# Altium PCB РАЗВОДКА.PcbDoc
Units mm, origin at the board's own origin, x right, y up, seen from the top; angles counter-clockwise.
Board outline 36.78 x 15.7 mm, 2 copper layers (Top Layer, Bottom Layer); 13 components, 7 nets, 31 pads, 2 vias.
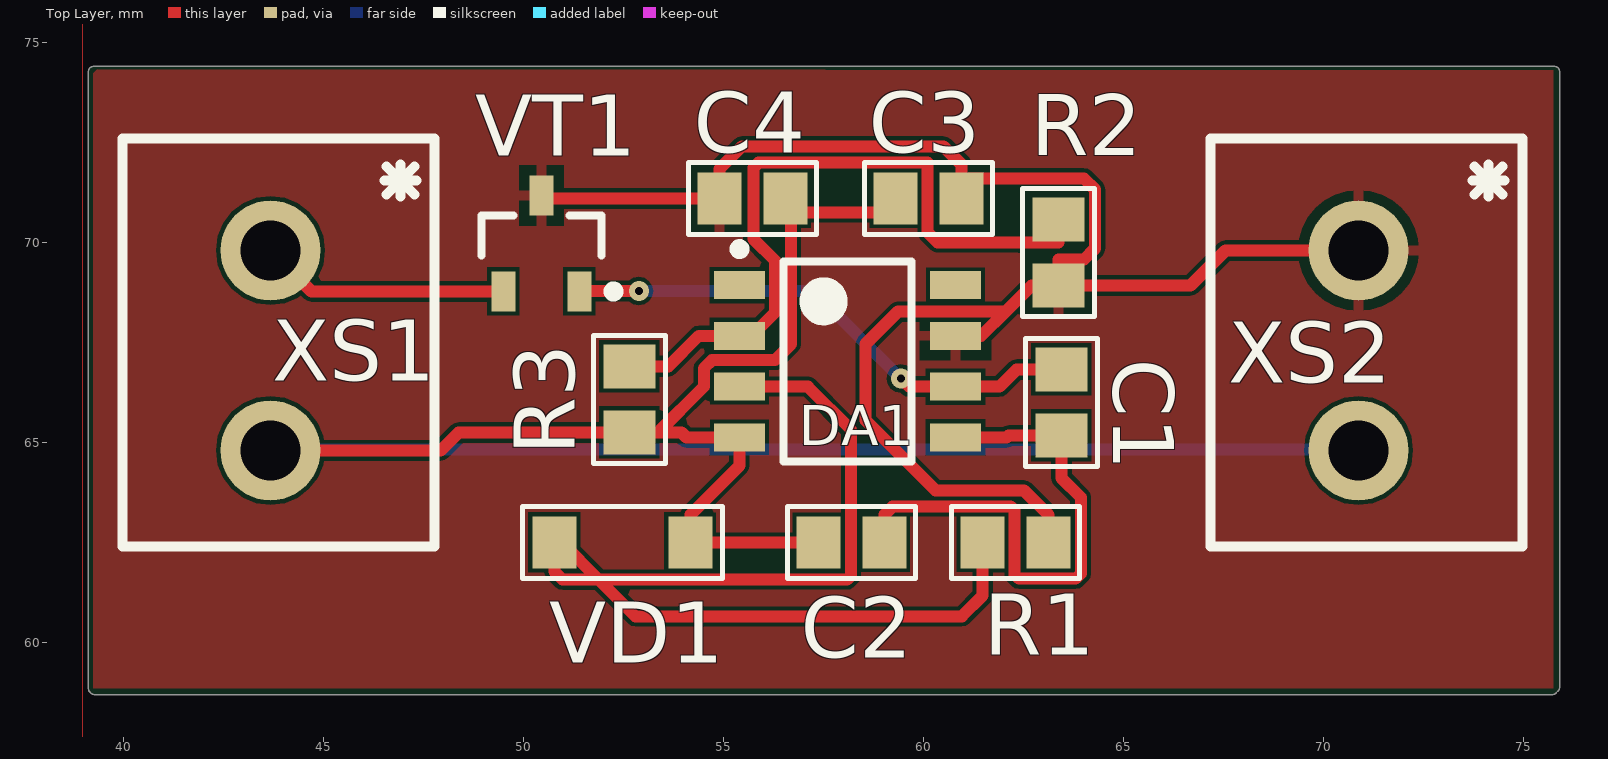
[diagram p0: Top Layer view]
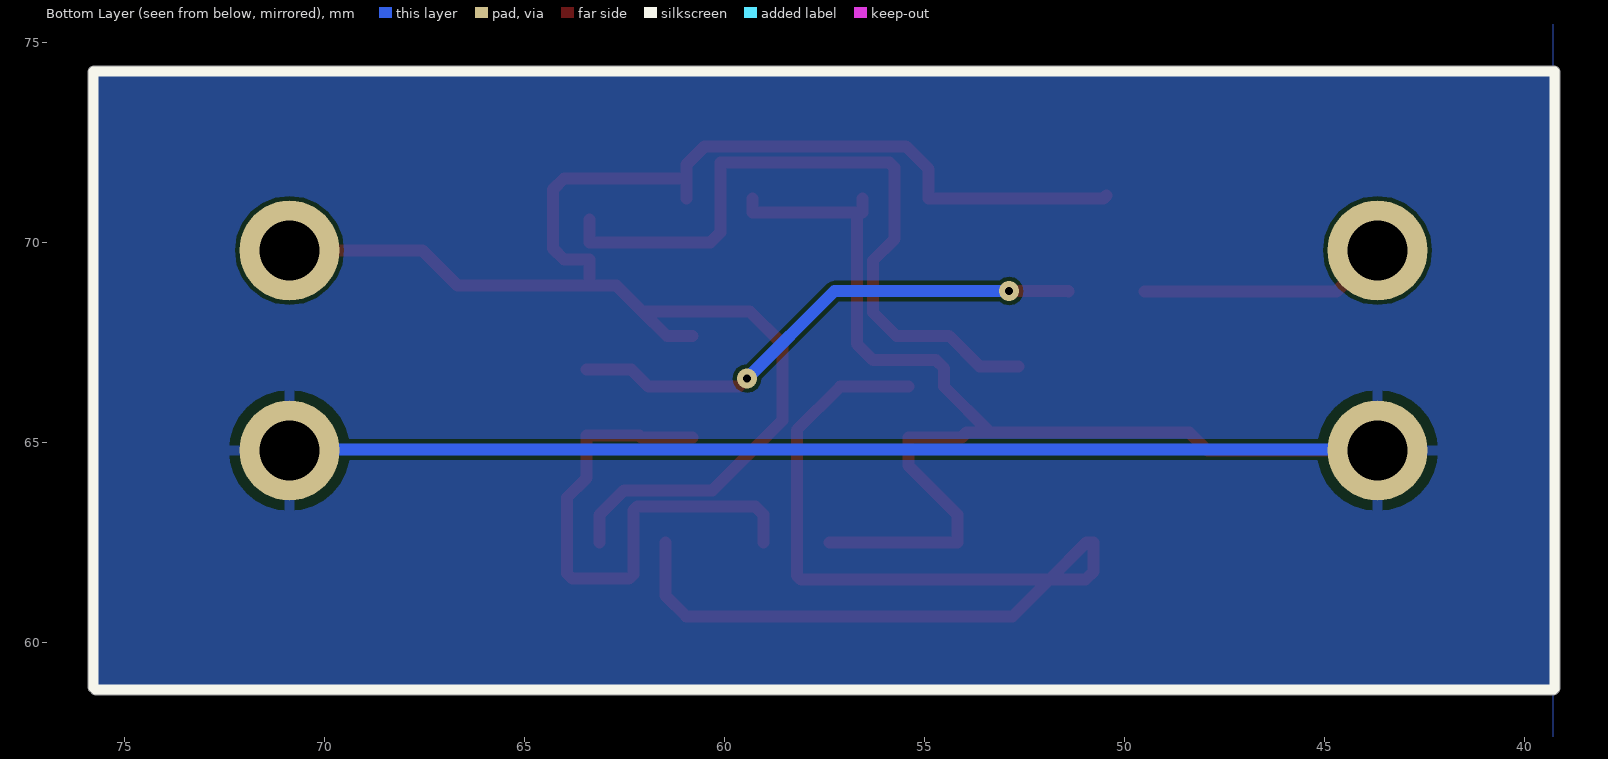
[diagram p1: Bottom Layer view, seen from below]
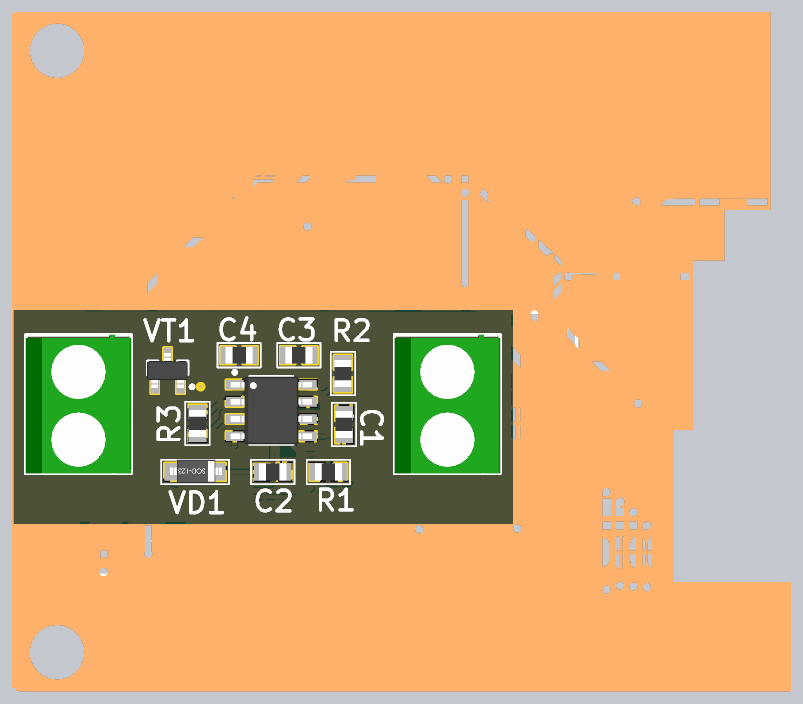
[diagram p2: 3D render of the assembled board from above, using the file's embedded part models]

## Layer stack, top to bottom
Top Solder: solder mask 0.0102, Solder Resist, Dk 3.5
Top Layer: signal copper 0.0356
Dielectric 1: dielectric 0.32, FR-4, Dk 4.8
Bottom Layer: signal copper 0.0356
Bottom Solder: solder mask 0.0102, Solder Resist, Dk 3.5

## Board outline
39.16,58.759 cw(c39.25,58.85) 39.123,58.85 39.123,74.275 cw(c39.25,74.275) 39.25,74.402 75.775,74.402 cw(c75.775,74.275) 75.902,74.275 75.902,58.875 cw(c75.775,58.875) 75.865,58.785 75.815,58.735 cw(c75.725,58.825) 75.725,58.698 39.275,58.698 cw(c39.275,58.825) 39.184,58.735 39.185,58.735

## Design rules (kind name [scope] priority, off if disabled: settings)
Clearance [All] p1: gap=0.1 ignorepadtopadclearanceinfootprint=FALSE except(0: Arc-Hole Track-Hole SMDPad-Hole THPad-Hole Via-Hole Fill-Hole Poly-Hole Region-Hole Text-Hole)
MinimumAnnularRing MinimumAnnularRing_1 [All] p1: minimumring=0.254
MinimumAnnularRing [All] p2: minimumring=0.254
PolygonConnect [All] p1: connectstyle=Relief reliefconductorwidth=0.254 reliefentries=4 polygonreliefangle="90 Angle" airgapwidth=0.254
RoutingVias [All] p1: holewidth=0.1 width=1.27 viastyle="Through Hole" minholewidth=0.2 minwidth=0.4 maxholewidth=0.2 maxwidth=0.4
SolderMaskExpansion [All] p1: expansion=0.102 istentingtop=FALSE
Width [All] p1: maxlimit=1 minlimit=0.1 preferedwidth=0.3
30 further rules are at their usual default settings.

## Classes and differential pairs
component class "Схема принципиальная": C1 C2 C3 C4 DA1 R1 R2 R3 VD1 VT1 XS1 XS2

## Components (designator, comment, footprint, x,y, rotation, side; value= is the part's Value field where it differs from the comment)
C1 "0.047u" 0805 63.45,66 r90 top
C2 "1000" 0805 58.2,62.5 r0 top
C3 "0.015u" 0805 60.125,71.1 r180 top
C4 "0.068u" 0805 55.725,71.1 r180 top
DA1 "КФ140УД18" SOIC-8 58.1,67.03 r0 top
R1 "300" 0805 62.3,62.5 r0 top
R2 "7,5k" 0805 63.375,69.75 r270 top
R3 "18k" 0805 52.65,66.075 r90 top
VD1 "MMSZ5235B" SOD-123 52.475,62.5 r180 top (schematic designator VD?)
VT1 "IRLML2402TRPBF" SOT23 50.45,69.975 r90 top
XS1 "XS 2 pin 220 B" DG126-5.0-02P 43.675,64.8 r0 top
XS2 "XS 2 pin 9v" DG126-5.0-02P 70.875,64.8 r0 top
ZBOAS351793286 "Comment" "BOASVIEWassembly:Вид спереди для сборочного:4:1:0:101" 89.35,2369.475 r0 top

## Footprints (in the part's own frame and the unit in brackets; to place one, negate y for a bottom-side part, rotate by r counter-clockwise, add the part's x,y. Pads: shape width x height; smd on the part's side, far side on the other; paste and mask are expansions set on the pad)
0805 [mm] "Чип (SMD)"
  rect 1.1x1.3 smd: 1(-0.825,0) 2(0.825,0)
  silkscreen extent -1.6,-0.9 1.6,0.9, body extent -1,-0.63 1,0.63, height 0.5
"BOASVIEWassembly:Вид спереди для сборочного:4:1:0:101" [mm]
DG126-5.0-02P [mm]
  round 2.5 hole 1.5: 1(0,5) 2(0,0)
  silkscreen extent -3.7,-2.4 4.1,7.8, body extent -3.7,-2.42 4.1,7.82, height 9.95
SOD-123 [mm] "(SMD)"
  rect 1.1x1.3 smd: 1(-1.7,0) 2(1.7,0)
  silkscreen extent -2.5,-0.9 2.5,0.9, body extent -2,-0.9 1.85,0.8, height 1.37
SOIC-8 [mm] "SOIC, 8-Leads, Body 4,90x3,90mm, Pitch 1,27mm, IPC Medium Density"
  rect 1.28x0.7 smd: 1(-2.7,1.905) 2(-2.7,0.635) 3(-2.7,-0.635) 4(-2.7,-1.905) 5(2.7,-1.905) 6(2.7,-0.635) 7(2.7,0.635) 8(2.7,1.905)
  silkscreen extent -2.82,-2.5 1.6,2.93, body extent -3,-2.5 3,2.5, height 1.75
SOT23 [mm] "SOT23, 3-Leads, Body 2,92x2,45mm, Pitch 0,95mm, IPC Medium Density"
  rect 1x0.6 smd: 1(-1.2,-0.95) 2(-1.2,0.95) 3(1.2,0)
  silkscreen extent -1.32,-1.92 0.7,1.5, body extent -1.3,-1.52 1.3,1.52, height 1.12

## Part data
C1: library part "К53-68\"R\"-25В-0.047 мкФ ±10% 0805_3", "К53-68\"R\"-25В-0.047 мкФ ±10%"
C2: library part "К53-68\"R\"-25В-1000 пФ ±10% 0805_2", "К53-68\"R\"-25В-1000 пФ ±10%"
C3: library part "К53-68\"R\"-25В-0.015 мкФ ±10% 0805_1", "К53-68\"R\"-25В-0.015 мкФ ±10%"
C4: library part "К53-68\"R\"-25В-0.068 мкФ ±10% 0805", "К53-68\"R\"-25В-0.068 мкФ ±10%"
DA1: "Операционный усилитель среднего класса точности с дифференциальным входом"
R1: library part "0.125Вт 0805 300 Ом, 5%, Чип резистор (SMD)", "0805-0.125 Вт -300 Ом±5%"
R2: library part "0.125Вт 0805 7,5 кОм, 5%, Чип резистор (SMD)", "0805-0.125 Вт -7,5 кОм±5%"
R3: library part "0.125Вт 0805 18 кОм, 5%, Чип резистор (SMD)", "0805-0.125 Вт -18 кОм±5%"
VD1: "Стабилитрон 6.8В 0.5Вт [SOD-123]"
VT1: "SI2304DDS-T1-GE3"

## Via types
v1: diameter 0.5, hole 0.2, Top Layer to Bottom Layer, 2 vias

## Nets (pads, with @x,y where several pads share a name; then routed paths per layer and width w, separated by ;. In a path a pad name is that pad's centre, name@x,y a point inside that pad or via, vN(x,y) a via of type N, cw(c..) or ccw(c..) an arc to the next point about the centre after c; other vN are vias at no path point)
GND: C2.1 C3.2 C4.1 DA1.4 R3.1 VD1.1 XS1.2 XS2.2 | length 56.8
  Top Layer w0.3: XS1.2 47.93,64.8 48.38,65.25 R3.1 53.363,65.25 ; C4.1 56.55,70.75 C4.1@56.693,70.75 ; C2.1 VD1.1 54.175,63.195 55.4,64.42 DA1.4 54.075,65.125 53.95,65.25 53.363,65.25 ; C3.2 59.3,70.75 C4.1@56.693,70.75 ; 53.363,65.25 54.508,66.396 54.508,66.853 54.712,67.056 56.286,67.056 56.693,67.462 C4.1@56.693,70.75
  Bottom Layer w0.3: XS1.2 43.696,64.821 70.854,64.821 XS2.2
NetC1_1: C1.1 C2.2 DA1.5 | length 13.7
  Top Layer w0.3: C2.2 59.025,63.195 59.23,63.4 62.179,63.4 62.281,63.298 62.281,61.697 62.382,61.595 63.805,61.595 63.932,61.722 63.932,63.627 63.45,64.109 C1.1 62.128,65.175 62.078,65.125 DA1.5
NetC1_2: C1.2 DA1.6 VT1.1 | length 13.2
  Top Layer w0.3: VT1.1 51.4,68.783 v1(52.883,68.783) ; v1(59.436,66.599) 59.64,66.395 DA1.6 61.9,66.395 62.33,66.825 C1.2
  Bottom Layer w0.3: v1(52.883,68.783) 57.252,68.783 v1(59.436,66.599)
NetC3_1: C3.1 C4.2 DA1.7 R1.2 R2.2 VT1.3 XS2.1 | length 42.1
  Top Layer w0.3: VT1.3 50.525,71.1 52.704,71.1 C4.2 54.9,71.842 55.458,72.4 60.5,72.4 60.95,71.95 C3.1@60.95,71.603 ; DA1.7 61.443,67.665 62.053,68.275 ; C3.1 C3.1@60.95,71.603 ; R1.2 63.125,63.189 62.514,63.8 60.304,63.8 58.551,65.553 58.551,67.462 59.364,68.275 62.053,68.275 ; XS2.1 67.55,69.8 66.675,68.925 R2.2 ; C3.1@60.95,71.603 64.008,71.603 64.287,71.323 64.287,69.85 64.008,69.571 63.375,69.571 R2.2 ; 62.053,68.275 62.703,68.925 R2.2
NetDA1_2: DA1.2 R2.1 R3.2 | length 18.1
  Top Layer w0.3: R3.2 53.619,66.9 54.384,67.665 DA1.2 55.702,67.665 56.29,68.253 56.29,69.545 55.75,70.085 55.75,71.87 55.88,72 60.1,72 60.1,70.253 60.35,70.002 63.375,70.002 R2.1
NetDA1_3: DA1.3 R1.1 VD1.2 | length 28.2
  Top Layer w0.3: DA1.3 57.11,66.395 58.191,65.314 58.191,61.671 58.09,61.57 51.883,61.57 ; R1.1 61.475,61.17 60.96,60.655 52.797,60.655 51.883,61.57 ; 51.883,61.57 50.978,61.57 50.775,61.773 VD1.2 50.952,62.5 51.883,61.57
NetVT1_2: VT1.2 XS1.1 | length 6.2
  Top Layer w0.3: XS1.1 44.7,68.775 VT1.2
pads on no net: DA1.1 DA1.8

## Polygon pours and split planes (outlines as drawn)
GND on Bottom Layer "GND_L02_P014" (solid, pour order 14): 39.25,74.325 39.25,58.85 75.725,58.85 75.75,58.825 75.75,74.3
no net on Bottom Layer "GND A" (solid, shelved, pour order 7): 39.275,46.375 39.275,96.4 142.075,96.4 142.075,46.375
NetC3_1 on Top Layer "NETC3_1_L01_P015" (solid, pour order 15): 39.25,74.325 39.25,58.85 75.725,58.85 75.75,58.825 75.75,74.3
no net on Top Layer "GND A" (solid, shelved, pour order 6): 38.981,46.316 38.981,96.341 141.781,96.341 141.781,46.316
no net on Top Overlay "NONET_L01_P-001" (solid): 39.325,73.95

## Silkscreen, mask and mechanical layers (free items; w line width, h text height)
Bottom Overlay:
  lines w0.254: 39.25,58.85 39.275,58.825 ; 39.25,58.85 39.25,74.275 75.775,74.275 75.775,58.875 75.725,58.825 39.275,58.825 ; 39.25,58.85 39.275,58.825
Mechanical 7:
  text "BOASFORMAT|А3|101|0|883070867|165354330|1000000000|4:1|" at 0,2540 h0
  text "DimPos|59940945|953011811|8809055|-24005906|15|2239518" at 129.875,2481.625 h0
  text "DimPos|69429134|952431102|-9675197|-23326772|11|1904472" at 200.925,2478.425 h0
  text "DimPos|68651575|946624016|8809055|-25068897|17|2409980" at 152,2468.1 h0
  text "DimPos|52687008|952529528|10452756|-18385826|25|3235839" at 107.275,2466.125 h0
  text "DimPos|73198819|949045276|-15875984|-21870078|21|2900793" at 226.25,2466.125 h0
  text "DimPos|88208661|949429134|-17224410|-12687008|5|1742827" at 267.8,2443.775 h0
  text "DimPos|38838583|943238189|18385827|12490158|3|1537097" at 51.95,2364.1 h0
  text "DimPos|56555118|943336614|24291338|20324803|23|3030109" at 81.95,2344.45 h0
  text "DimPos|54527559|939271654|10748031|19360237|0|1669352" at 111.2,2336.575 h0
  text "DimPos|73011811|938976378|-11712598|20029528|19|2283603" at 215.2,2334.125 h0
  text "DimPos|63818898|938494094|6299213|20620078|9|1454805" at 146.1,2331.4 h0
  text "SET2|Superlayer=MechanicalLayer7|Wsuperlayer=MechanicalLayer8|Layergrid=MechanicalLayer9|Werase=MechanicalLayer11|Layermark=MechanicalLayer12|Layerstamp=MechanicalLayer13|Thinline=0,18|Basicline=0,6|Gridline=0,18|Boardline=0,6|Contourpolygonline=0,6|PcbGridStep=1,25|PcbGridCleareanceAtView=0|PcbGridNumberEach=l4|PcbGridLineEach=l2|PcbGridCountSecondaryStrip=1|PcbGridEnabledStrip=True|PcbSignalGridEnabled=True|PcbSignalShowBukva=True|RealSignalLayerNames=False|PcbGridEnabledBothSide=False|RealLayerNames=False|SilkShowPad=True|SilkViewName=Слой маркировки|SilkShowHole=True|SilkShowAxis=True|SilkShowBukva=True|SilkShowGrid=False|SolderShowGrid=False|SolderViewName=Слой маски|SolderShowAxis=False|SolderShowBukva=False|MainViewShowGrid=False|MainViewUseShapesDrill=False|ShowBukvaOnSboky=True|Density=2,2|TableName=Таблица 1|RazrezWidth=100|Sher=Rz 160|Asstoplayer=TopOverlay|Asstoplayer2=MechanicalLayer15|Assbottomlayer=MechanicalLayer2|Assbottomlayer2=MechanicalLayer15|AssMinDiameterHoles=2|AssDim=False|AssMech=False|AssSilk=False|AssComponentSilk=False|AssFreeSilk=False|AssSmdPads=False|AssGridEnable=False|Mirror=Horisontal|PcbGridFontSize=5|PcbGridCenterZero=False|TTStampDistance=12|MainFontSize=5|PolyStep=2|PcbDrillDrawingGridEnabled=False|PcbDrillDrawingViewName=Слой сверловки|PcbDrillDrawingShowBukva=False|PcbDrillDrawingShowAxis=False|PcbSignalLayersUseDrill=False|PcbSignalLayersUseShapesDrill=False|PcbSignalLayersShowAxis=False" at 0,0.025 h0
  text "2TT0007#  8 Клеймить." at 0,0 h0
  text "2TT0006#  7 Маркировать обозначение и заводской номер печатного узла черной краской МКЭ ОСТ 4ГО.054.2050М2 шрифтом 3,5 или 5 тип А ГОСТ 2.304-81, вместе, удобном для чтения." at 0,0 h0
  text "2TT0005#  6 Покрытие лак УР-231 ТУ6-21-14-90(3). Допускается покрытие лаком ЭП-730 ГОСТ 20824-81(3)." at 0,0 h0
  text "2TT0004#  5 Элементы поверхностного монтажа паять припойной пастой ПОС-61 ЛОК ТУ 400 К''Р''-1805-22-91, флюс ФПС-3 ТУ400 СП \"ЭВ\"-2178-137-98." at 0,0 h0
  text "2TT0003#  4 Меры защиты от статического электричества по ОСТ 92-1615-74. Степень жесткости II по ОСТ11.073.062-2001." at 0,0 h0
  text "2TT0002#  3** Размеры обеспеч. инстр." at 0,0 h0
  text "2TT0001#  2* Размеры для справок." at 0,0 h0
  text "2TT0000#  1 Установку элементов производить по чертежу." at 0,0 h0
  text "2STAMP|Организация|НИУ СФ МЭИ ПЭ2-18" at 0,0 h0
  text "2STAMP|Масса|120 г" at 0,0 h0
  text "2STAMP|Первичная применяемость|СФ МЭИ ЛБ ПЭ2-18 11.03.04 03" at 0,0 h0
  text "2STAMP|Наименование1|Стабилизатор" at 0,0 h0
  text "2STAMP|ТипДокумента|Сборочный чертёж" at 0,0 h0
  text "2STAMP|Наименование2|напряжения" at 0,0 h0
  text "2STAMP|Разработал|Гончаренко В.Ю." at 0,0 h0
  text "2STAMP|Проверил|Смолин В.А." at 0,0 h0
  text "2STAMP|Утвердил|Рассказа Д.С." at 0,0 h0
  text "2STAMP|Var|Нач. отд." at 0,0 h0
  text "2STAMP|Tech|Т.контр." at 0,0 h0
  text "2STAMP|Normo|Н.контр." at 0,0 h0
  text "2STAMP|Check|Пров." at 0,0 h0
  text "2STAMP|Design|Разраб." at 0,0 h0
  text "2STAMP|Utv|Утв." at 0,0 h0
  text "2STAMP|Обозначение|СФ МЭИ ЛБ ПЭ2-18 11.03.04 03  СБ" at 0,0 h0
  text "BOASVIADRILLTABLE:none,78740,2," at 0,0 h0
  text "2BOASDRILLTABLE:none,590551,Да,4,True," at 0,0 h0
Mechanical 9:
  circle w0.6: c143.65,2396.075 r0.2
  circle w0.6: c224.05,2411.55 r0.2
  circle w0.6: c176.35,2419.175 r0.2
  circle w0.6: c174.375,2404.425 r0.2
  circle w0.6: c152.25,2420.65 r0.2
  circle w0.6: c133.825,2419.425 r0.2
  circle w0.6: c98.65,2395.825 r0.2
  circle w0.6: c138.5,2385.75 r0.2
  circle w0.6: c162.1,2383.775 r0.2
  circle w0.6: c185.45,2385 r0.2
  circle w0.6: c185.925,2410.575 r0.2
  lines w0.18: 43.046,2364.1 51.95,2364.1 98.65,2395.825 ; 69.254,2344.45 81.95,2344.45 143.65,2396.075 ; 94.056,2466.125 107.275,2466.125 133.825,2419.425 ; 101.96,2336.575 111.2,2336.575 138.5,2385.75 ; 119.187,2481.625 129.875,2481.625 152.25,2420.65 ; 137.405,2331.4 146.1,2331.4 162.1,2383.775 ; 140.879,2468.1 152,2468.1 174.375,2404.425 ; 185.45,2385 215.2,2334.125 226,2334.125
  text "7" at 121.687,2484.155 h10.75
  text "8" at 143.379,2470.63 h10.75
  text "6" at 96.556,2468.655 h10.75
  text "5" at 45.546,2366.63 h10.75
  text "4" at 71.754,2346.98 h10.75
  text "1" at 104.46,2339.105 h10.75
  text "3" at 217.7,2336.655 h10.75
  text "2" at 139.905,2333.93 h10.75
Mechanical 13:
  lines w0.18: 230,2253 295,2253 ; 230,2258 295,2258 ; 230,2263 295,2263 ; 230,2268 295,2268 ; 230,2273 295,2273 ; 230,2288 295,2288 ; 230,2293 295,2293 ; 230,2298 295,2298 ; 369.96,2268 369.96,2283 ; 374.98,2268 374.98,2283
  lines w0.6: 8,2273 20,2273 ; 8,2308 20,2308 ; 8,2333 20,2333 ; 8,2358 20,2358 ; 8,2475 20,2475 ; 13,2248 13,2393 ; 13,2415 13,2535 ; 20,2393 8,2393 8,2248 20,2248 ; 20,2415 8,2415 8,2535 20,2535 ; 20,2521 90,2521 90,2535 ; 230,2248 230,2303 415,2303 ; 230,2278 295,2278 ; 230,2283 295,2283 ; 237,2278 237,2303 ; 247,2248 247,2303 ; 270,2248 270,2303 ; 285,2248 285,2303 ; 295,2248 295,2303 415,2303 ; 295,2263 365,2263 415,2263 ; 295,2288 415,2288 ; 365,2248 365,2288 ; 365,2268 415,2268 ; 365,2283 380,2283 415,2283 ; 380,2268 380,2288 ; 385.57,2263 385.57,2268 ; 397,2268 397,2288 ; 415,2311 415,2303 ; 20,2248 415,2248 415,2535 20,2535 ; 20,2248 20,2535
  text "СФ МЭИ ЛБ ПЭ2-18 11.03.04 03  СБ" at 89.509,2529.975 h7.19 r180
  text "Перв. примен." at 11.976,2494.373 h5.38 r90
  text "СФ МЭИ ЛБ ПЭ2-18 11.03.04 03" at 17.976,2481.911 h5.38 r90
  text "Справ. №" at 11.976,2437.78 h5.38 r90
  text "Подп. и дата" at 11.976,2365.961 h5.38 r90
  text "Инв. № дубл." at 11.976,2336.457 h5.38 r90
  text "Взам. инв. №" at 11.976,2311.496 h5.38 r90
  text "1 Установку элементов производить по чертежу. /   2* Размеры для справок. /   3** Размеры обеспеч. инстр. /   4 Меры защиты от статического электричества по ОСТ 92-1615-74. Степень жесткости II по ОСТ11.073.062-2001. /   5 Элементы поверхностного монтажа паять припойной пастой ПОС-61 ЛОК ТУ 400 К''Р''-1805-22-91, флюс ФПС-3 ТУ400 СП \"ЭВ\"-2178-137-98." at 235,2311 h7.68
  text "СФ МЭИ ЛБ ПЭ2-18 11.03.04 03  СБ" at 318.157,2293.391 h7.68
  text "Лит." at 369.328,2284.024 h5.38
  text "Масса" at 384.108,2284.024 h5.38
  text "Масштаб" at 399.133,2284.024 h5.38
  text "Подп. и дата" at 11.976,2282.461 h5.38 r90
  text "Стабилизатор" at 314.675,2280.891 h7.68
  text "Изм." at 230.687,2279.024 h5.38
  text "Лист" at 238.024,2279.024 h5.38
  text "№ докум." at 252.271,2279.024 h5.38
  text "Подп." at 273.92,2279.024 h5.38
  text "Дата" at 285.963,2279.024 h5.38
  text "Разраб." at 230.533,2273.771 h5.38
  text "Гончаренко В.Ю." at 247.68,2273.771 h5.14
  text "120 г" at 383.233,2273.391 h7.68
  text "4:1" at 403.065,2273.391 h7.68
  text "напряжения" at 317.479,2272.891 h7.68
  text "Пров." at 230.533,2268.771 h5.38
  text "Смолин В.А." at 247.68,2268.771 h5.38
  text "Сборочный чертёж" at 316.094,2265.524 h5.38
  text "Т.контр." at 230.533,2263.771 h5.38
  text "Лист" at 366.442,2263.771 h5.38
  text "Листов" at 387.485,2263.771 h5.38
  text "1" at 407.424,2263.771 h5.38
  text "Нач. отд." at 230.533,2258.771 h5.38
  text "6 Покрытие лак УР-231 ТУ6-21-14-90(3). Допускается покрытие лаком ЭП-730 ГОСТ 20824-81(3). /   7 Маркировать обозначение и заводской номер печатного узла черной краской МКЭ ОСТ 4ГО.054.2050М2 шрифтом 3,5 или 5 тип А ГОСТ 2.304-81, вместе, удобном для чтения. /   8 Клеймить." at 25,2255 h7.68
  text "Н.контр." at 230.533,2253.771 h5.38
  text "НИУ СФ МЭИ ПЭ2-18" at 368.285,2253.391 h7.68
  text "Инв. № подл." at 11.976,2251.457 h5.38 r90
  text "Утв." at 230.533,2248.771 h5.38
  text "Рассказа Д.С." at 247.68,2248.771 h5.38
  text "Копировал" at 305.533,2243.771 h5.38
  text "Формат А3" at 386.625,2243.771 h5.38

## Dimensions
75.725,58.825 to 75.775,74.275 on Bottom Overlay
39.275,58.825 to 75.725,58.825 on Bottom Overlay

## Text inside footprints (layer, text, board x,y; h text height)
ZBOAS351793286: Mechanical 12 "DA1" at 160.394,2394.385 h4; Mechanical 12 "R3" at 138.007,2393.406 h6.1 r90; Mechanical 12 "C1" at 191.813,2403.047 h6.1 r270; Mechanical 12 "VT1" at 128.05,2423.338 h6.1; Mechanical 12 "C2" at 160.581,2373.137 h6.1; Mechanical 12 "XS2" at 203.334,2400.638 h6.1; Mechanical 12 "C3" at 167.381,2423.638 h6.1; Mechanical 12 "R2" at 183.58,2423.398 h6.1; Mechanical 12 "R1" at 178.897,2373.438 h6.1; Mechanical 12 "C4" at 149.881,2423.638 h6.1; Mechanical 12 "VD1" at 135.45,2372.638 h6.1; Mechanical 12 "XS1" at 107.75,2400.838 h6.1